# Altium PCB Altium_PCB_Rev3.PcbDoc
Units mil, origin at the board's own origin, x right, y up, seen from the top; angles counter-clockwise.
Board outline 1482.14 x 1194.03 mil, 4 copper layers (Top Layer, Layer 1 - GND, Layer 2 - PWR, Bottom Layer), stack 62.45 mil thick; 49 components, 31 nets, 195 pads, 78 vias.
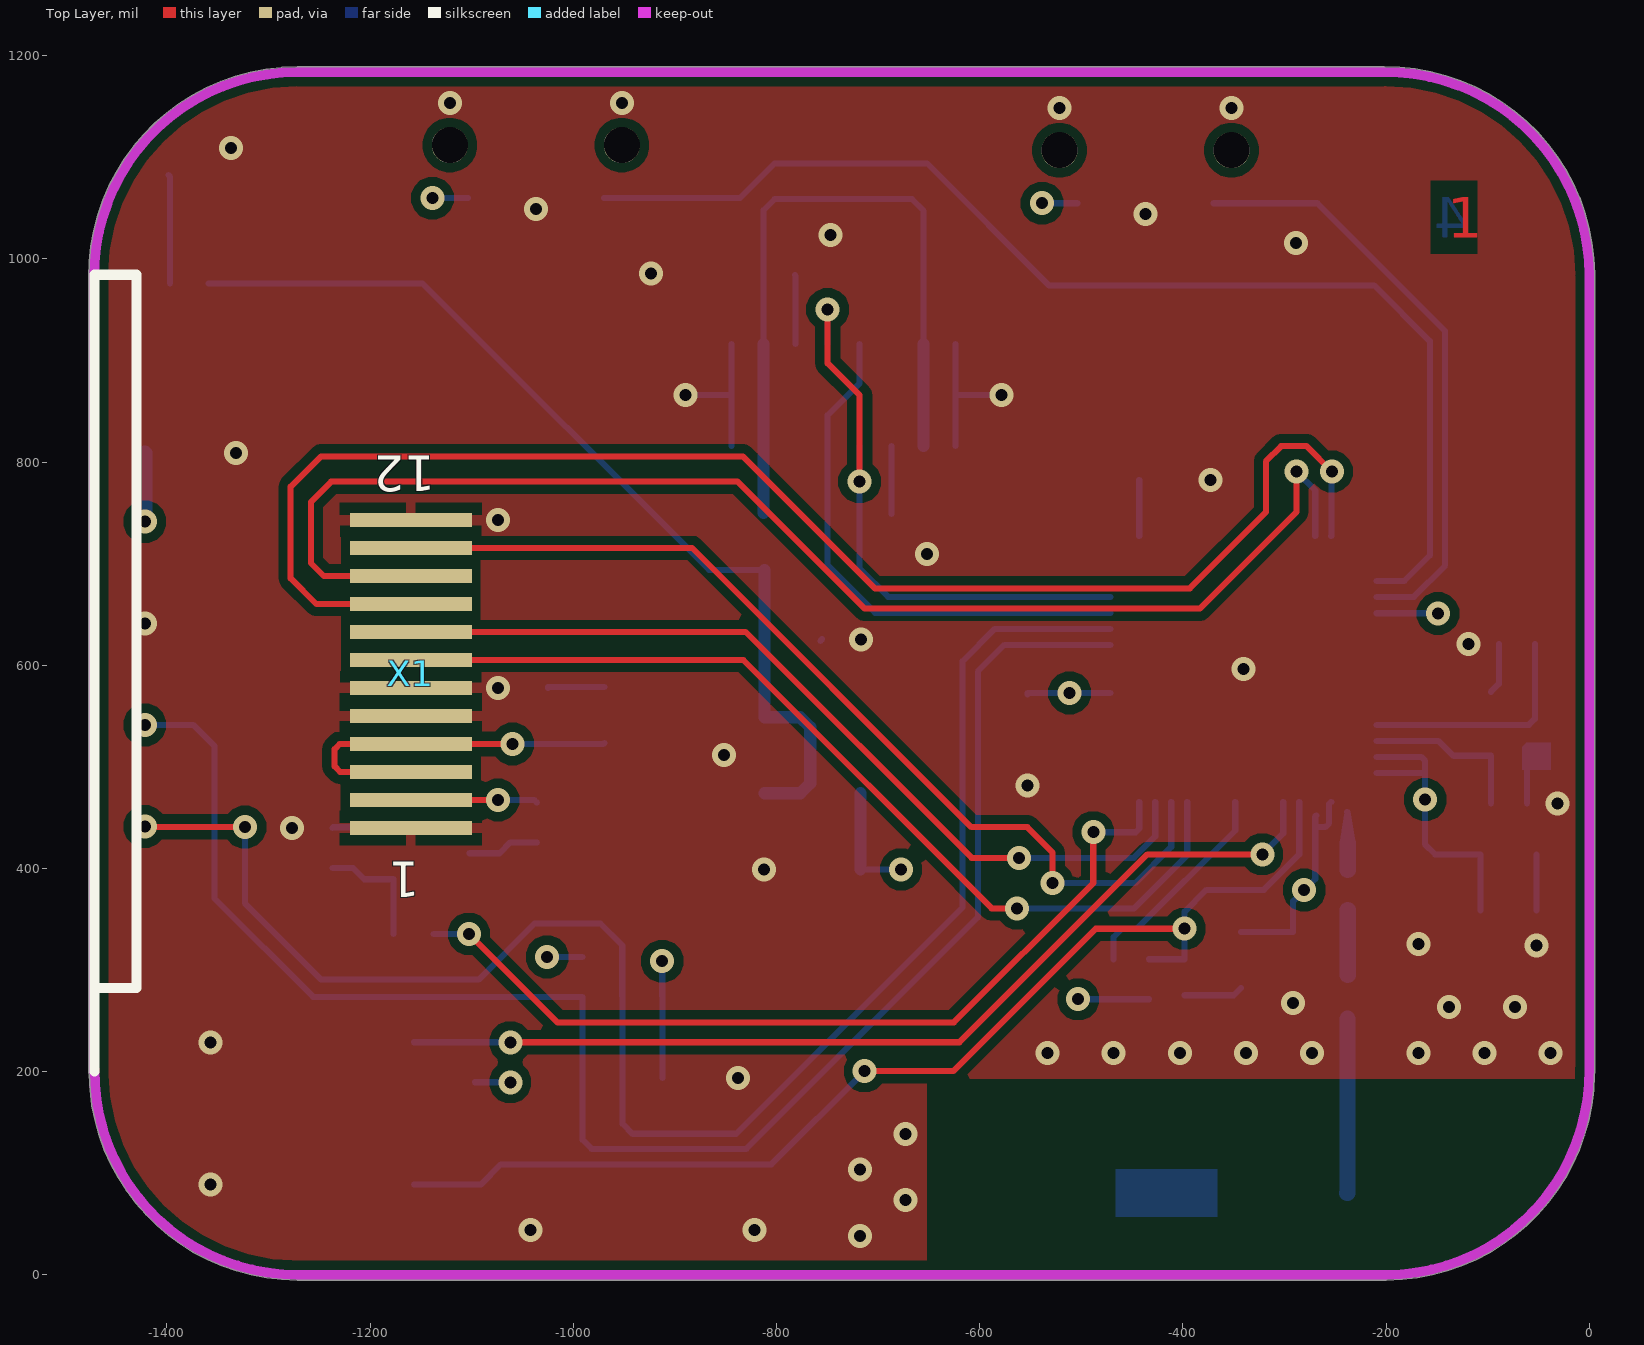
[diagram p0: Top Layer view]
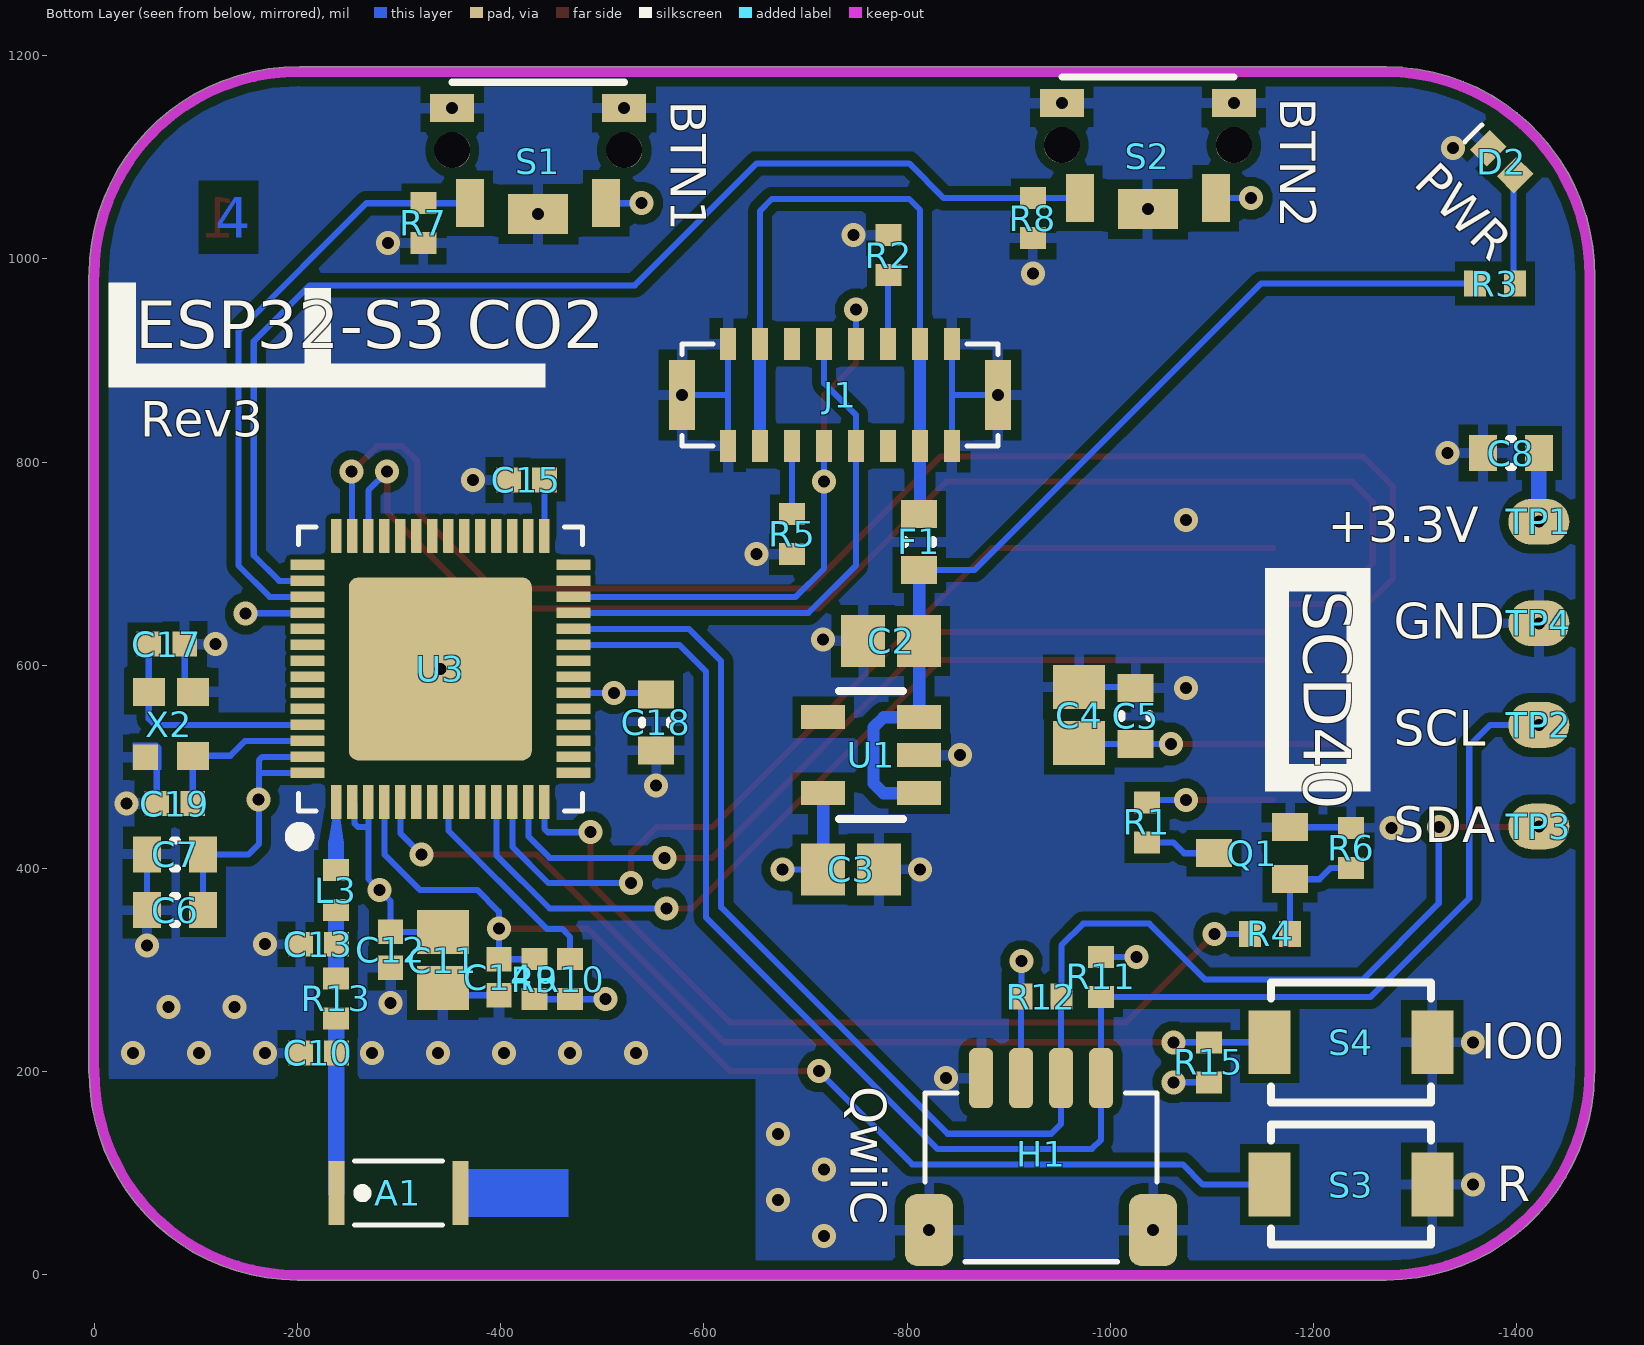
[diagram p1: Bottom Layer view, seen from below]
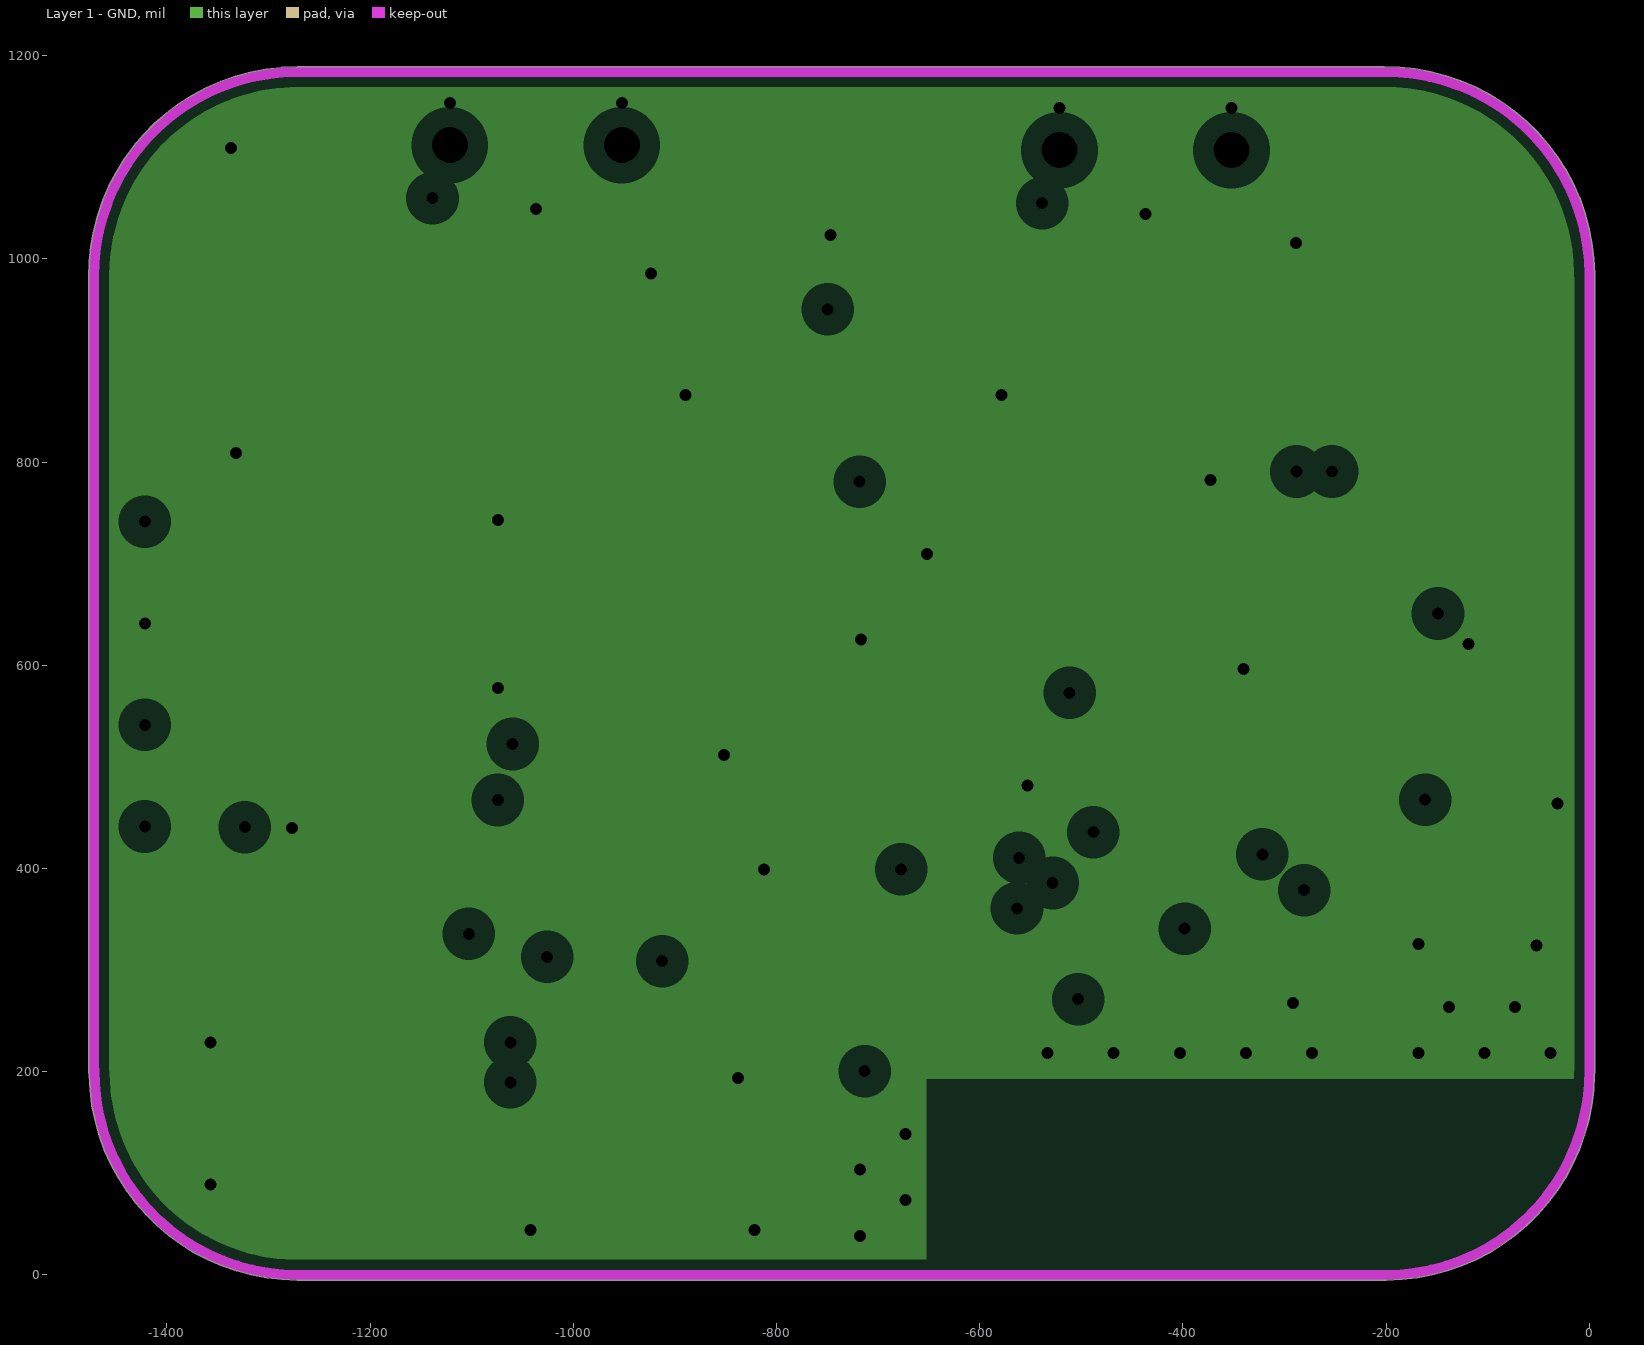
[diagram p2: Layer 1 - GND, clearances drawn from the general rule]
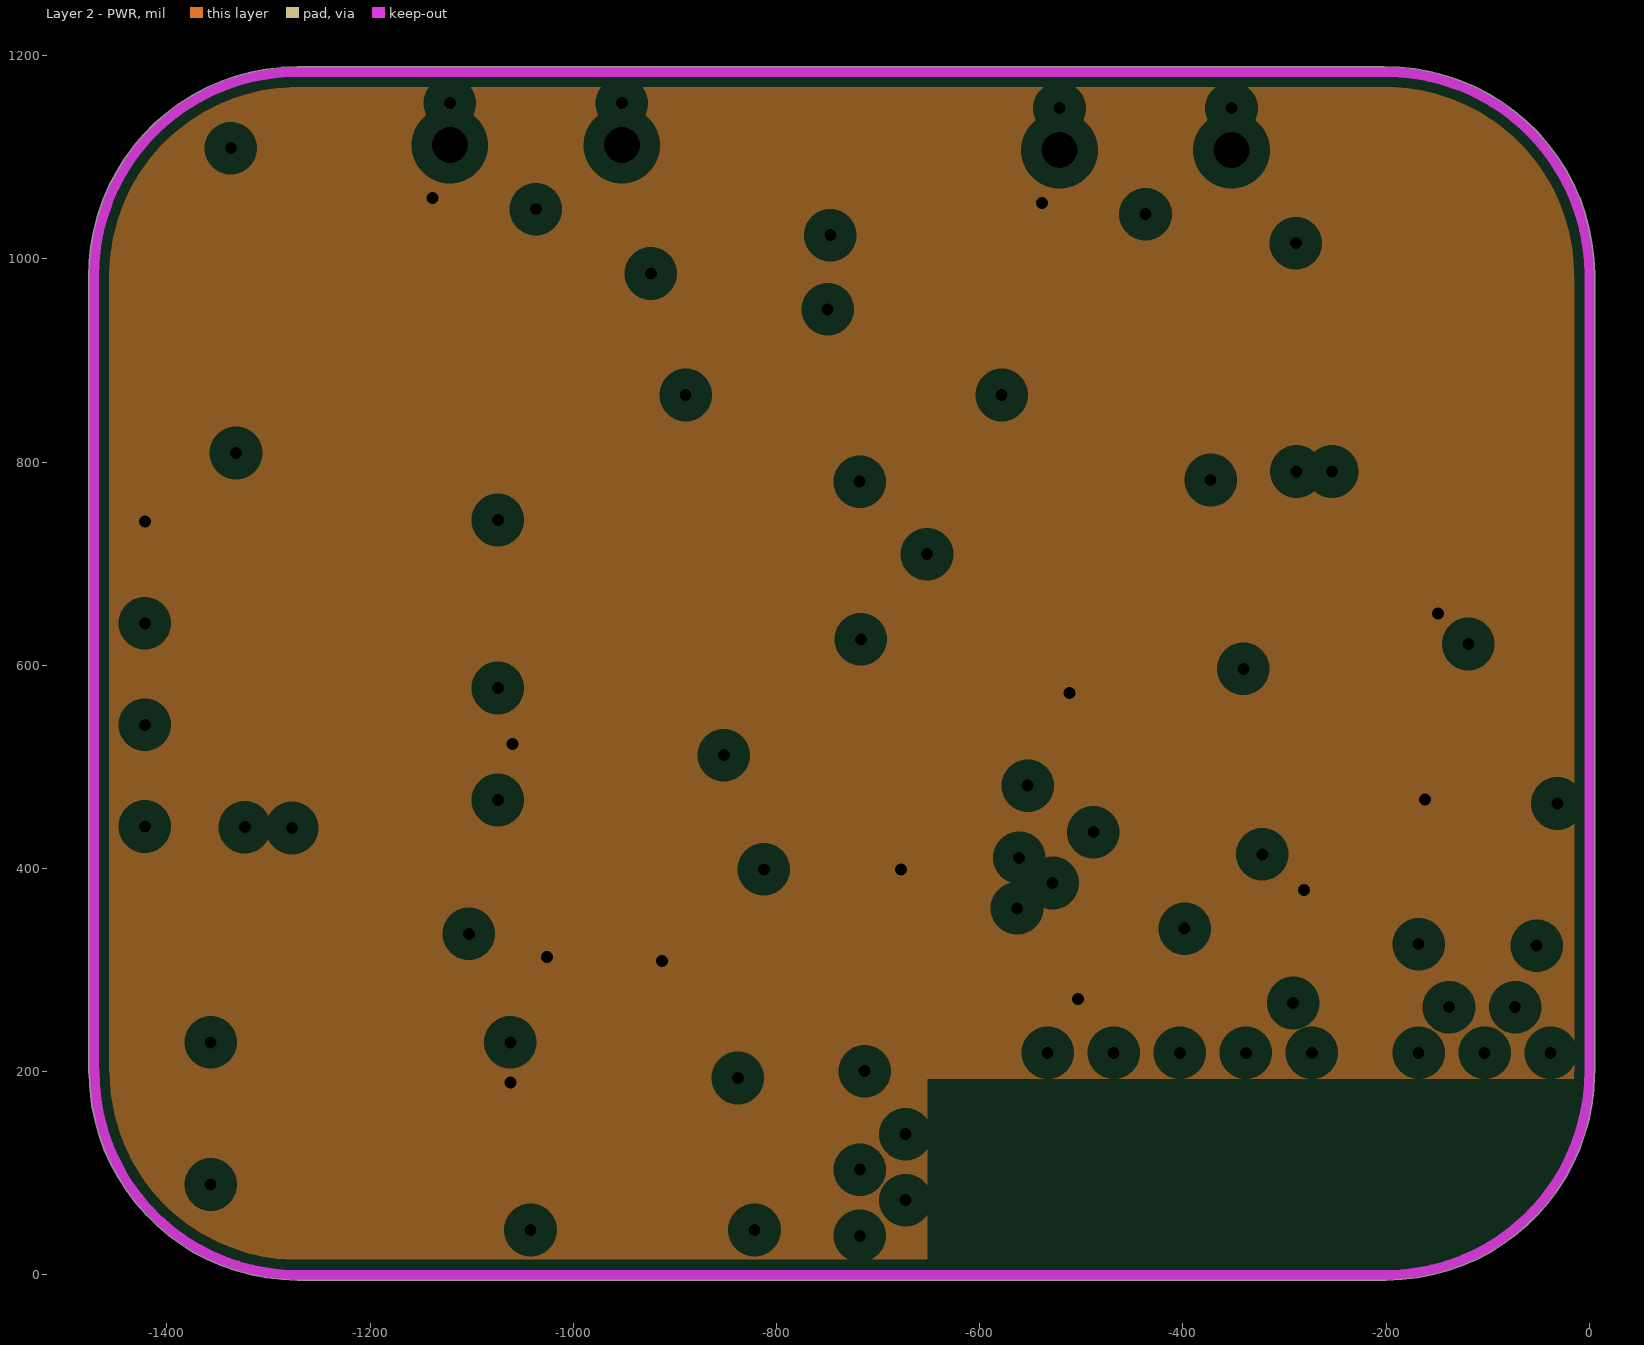
[diagram p3: Layer 2 - PWR, clearances drawn from the general rule]
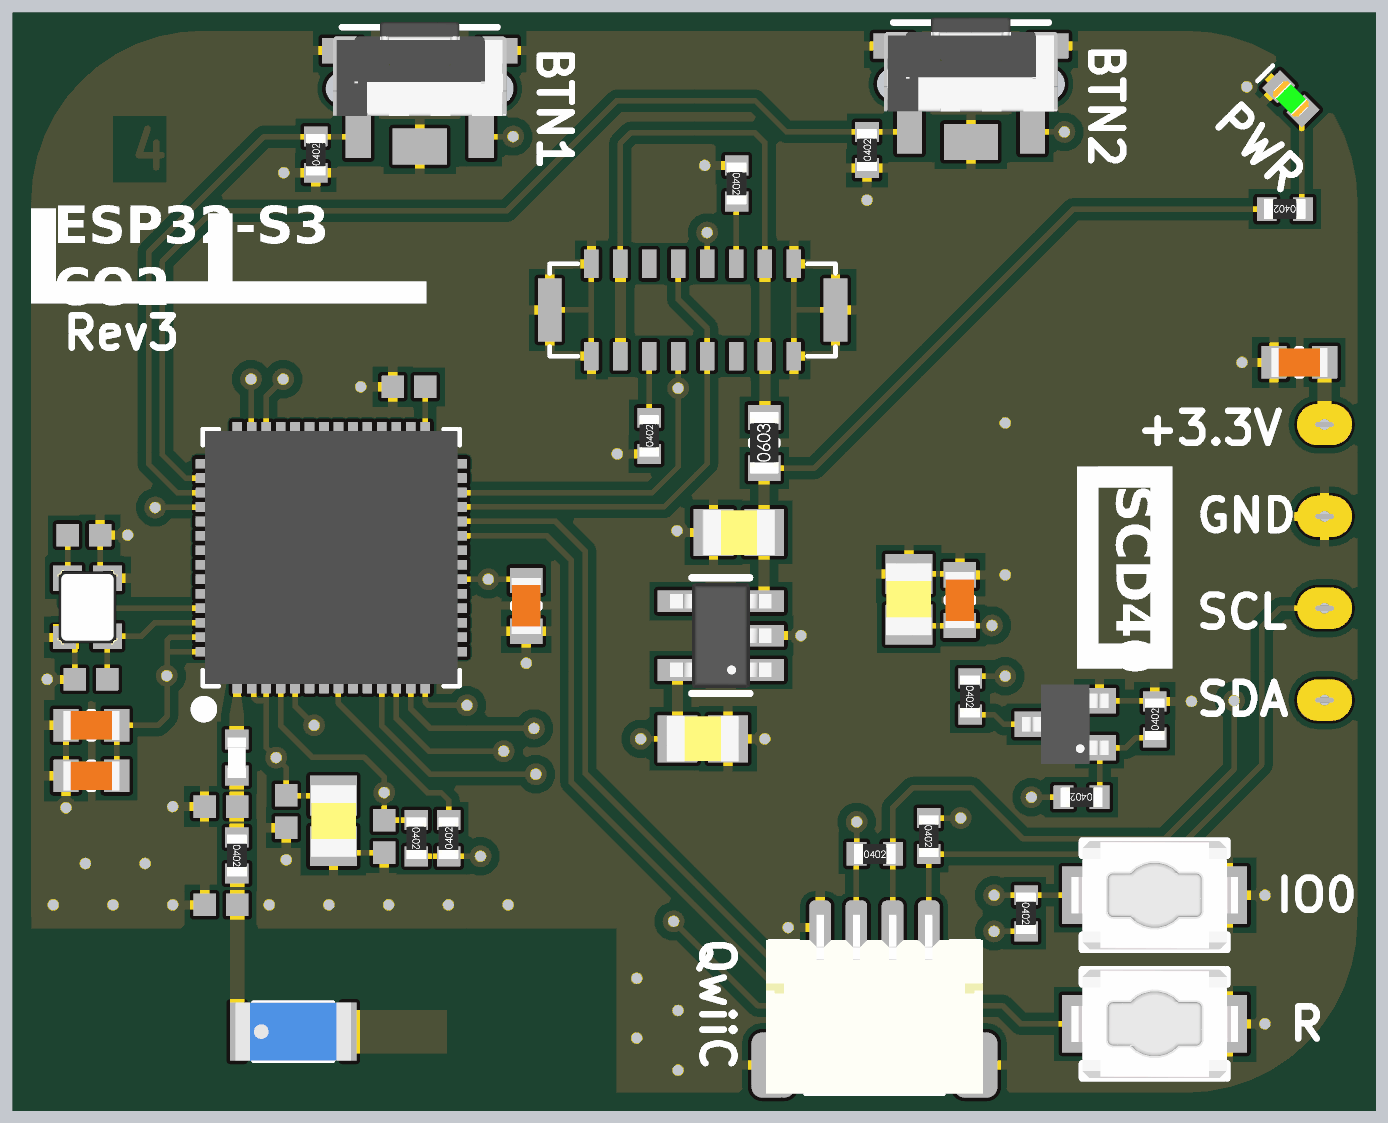
[diagram p4: 3D render of the assembled board from below, using the file's embedded part models]

## Layer stack, top to bottom
Top Solder: solder mask 0.0098, Solder Resist, Dk 3.5
Top Layer: signal copper 1.378
Dielectric 2: prepreg 8.2839, PP-006, Dk 4.1
Layer 1 - GND: plane copper 0.5984, net GND
Dielectric 1: dielectric 41.9291, FR-4, Dk 4.8
Layer 2 - PWR: plane copper 0.5984, net +3.3V
Dielectric 3: prepreg 8.2839, PP-006, Dk 4.1
Bottom Layer: signal copper 1.378
Bottom Solder: solder mask 0.0098, Solder Resist, Dk 3.5

## Board outline
-1476.8,198.87 -1476.8,981.86 cw(c-1271.8,984) -1271.8,1189.01 -202.03,1189.01 cw(c-199.89,984.01) 5.12,985.46 5.33,984.01 5.33,198.99 5.01,197.22 cw(c-199.99,200) -199.96,-5.01 -199.99,-5.02 -1271.48,-5.02 cw(c-1271.48,200)

## Design rules (kind name [scope] priority, off if disabled: settings)
Clearance Clearance_U4 [All vs InComponent('U4')] p1: gap=8 ignorepadtopadclearanceinfootprint=FALSE
Clearance Clearance_U3 [All vs InComponent('U3')] p2: gap=5 ignorepadtopadclearanceinfootprint=FALSE
Clearance Clearance_J1 [All vs InComponent('J1')] p3: gap=7 ignorepadtopadclearanceinfootprint=FALSE
Clearance [All] p4: gap=9 ignorepadtopadclearanceinfootprint=FALSE
MinimumSolderMaskSliver [All] p1: minsoldermaskwidth=1
PlaneClearance [All] p1: clearance=20
PlaneConnect PlaneConnect_Via [(IsVia)] p1: planeconnectstyle=Direct reliefexpansion=20 reliefentries=4 reliefconductorwidth=10 reliefairgap=10
PlaneConnect [All] p2: planeconnectstyle=Relief reliefexpansion=20 reliefentries=4 reliefconductorwidth=10 reliefairgap=10
PolygonConnect PolygonConnect_Via [All vs (IsVia)] p1: connectstyle=Direct reliefconductorwidth=10 reliefentries=4 polygonreliefangle="90 Angle" airgapwidth=10
PolygonConnect [All] p2: connectstyle=Relief reliefconductorwidth=10 reliefentries=4 polygonreliefangle="90 Angle" airgapwidth=10
RoutingVias [All] p1: holewidth=28 width=50 viastyle="Through Hole" minholewidth=28 minwidth=50 maxholewidth=28 maxwidth=50
SilkToSilkClearance [All] p1 off: silktosilkclearance=1
SilkToSolderMaskClearance [IsPad] p1: minsilkscreentomaskgap=1 clearancetoexposedcopper=TRUE
SolderMaskExpansion [All] p1: expansion=4 istentingtop=FALSE
Width Width_RF [InNetClass('RF')] p1: maxlimit=15.91 minlimit=15.91 preferedwidth=15.91 impedanceprofiledriven=TRUE impedanceprofileid={8F698573-BB34-4F24-805D-D6F2146511F8} impedanceprofilevalue=50.000000 minimp=50.000000 maximp=50.000000 favimp=50.000000
Width [All] p2: maxlimit=20 minlimit=6 preferedwidth=6
25 further rules are at their usual default settings.

## Classes and differential pairs
net class RF: NetA1_1 NetL3_2

## Components (designator, comment, footprint, x,y, rotation, side; value= is the part's Value field where it differs from the comment)
A1 "ANT3216LL00R2400A" ANT3216LL00R2400A -299.26,80.51 r180 bottom value="Chip Antenna"
C2 "10uF" CAPC2012X140N -784.34,624 r0 bottom
C3 "10uF" CAPC2012X140N -744.97,399.19 r180 bottom
C4 "10uF" CAPC2012X140N -969.4,551.13 r90 bottom
C5 "0.1uF" CAPC1608X09L -1024.97,550.16 r90 bottom
C6 "1uF" CAPC1608X09L -79.46,359 r0 bottom
C7 "0.1uF" CAPC1608X09L -79.46,414 r0 bottom
C8 "0.1uF" CAPC1608X09L -1394.34,809 r0 bottom
C10 "DNP" CAPC1005X56N -220.6,218.55 r0 bottom
C11 "10uF" CAPC2012X140N -342.96,309.89 r270 bottom
C12 "0.1uF" CAPC1005X56N -291.55,320.16 r270 bottom
C13 "2.5pF" CAPC1005X56N -220.52,325.55 r0 bottom
C14 "1uF" CAPC1005X56N -398.27,293.03 r270 bottom
C15 "1uF" CAPC1005X56N -425.24,782.45 r0 bottom
C17 "10pF" CAPC1005X56N -71.31,621 r180 bottom
C18 "1uF" CAPC1608X09L -552.91,543.96 r90 bottom
C19 "10pF" CAPC1005X56N -79.18,464 r0 bottom
D2 "Green Led" LED1005X40N-Green -1385.12,1095.77 r225 bottom
F1 "PTC" "RESC1608X06L (0603 FOOTPRINT)" -811.9,721.44 r90 bottom
H1 "QWiiC" SM04B-SRSS-TB -931.9,119 r180 bottom locked
J1 "USB-C VERT" TYPE-C-31-G-06 -733.97,866.04 r180 bottom
L3 "2.2nF" INDC1005X40L -237.8,378.86 r90 bottom
Q1 "MMST3904" SC-70 -1139.56,415.08 r0 bottom
R1 "10R" "RESC1005X40L (0402 FOOTPRINT)" -1036.05,445.36 r270 bottom
R2 "5.1K" "RESC1005X40L (0402 FOOTPRINT)" -781.9,1003.68 r270 bottom
R3 "22K" "RESC1005X40L (0402 FOOTPRINT)" -1378.59,975.75 r0 bottom
R4 "1K" "RESC1005X40L (0402 FOOTPRINT)" -1157.28,335.67 r0 bottom
R5 "5.1K" "RESC1005X40L (0402 FOOTPRINT)" -686.72,729.09 r90 bottom
R6 "10K" "RESC1005X40L (0402 FOOTPRINT)" -1236.97,420.36 r90 bottom
R7 "10K" "RESC1005X40L (0402 FOOTPRINT)" -323.77,1035.14 r90 bottom
R8 "10K" "RESC1005X40L (0402 FOOTPRINT)" -923.77,1040.14 r90 bottom
R9 "10K" "RESC1005X40L (0402 FOOTPRINT)" -433.27,291.07 r270 bottom
R10 "10K" "RESC1005X40L (0402 FOOTPRINT)" -468.27,291.07 r90 bottom
R11 "10K" "RESC1005X40L (0402 FOOTPRINT)" -990.95,293.37 r270 bottom
R12 "10K" "RESC1005X40L (0402 FOOTPRINT)" -932.21,274 r180 bottom
R13 "0R" "RESC1005X40L (0402 FOOTPRINT)" -238,272.31 r270 bottom
R15 "10K" "RESC1005X40L (0402 FOOTPRINT)" -1096.9,209.31 r270 bottom
S1 "Push" 1TS003A-1600-3500A -436.9,1106.99 r180 bottom value="Switch R/A Micro"
S2 "Push" 1TS003A-1600-3500A -1036.9,1111.99 r180 bottom value="Switch R/A Micro"
S3 "=Value" TL1015AF160QG -1236.9,89 r180 bottom
S4 "=Value" TL1015AF160QG -1236.9,229 r180 bottom
TP1 "Test Point, 1mm Top Layer" TP100TL#1 -1408.79,570.38 r270 bottom
TP2 "Test Point, 1mm Top Layer" TP100TL#2 -1415.74,707.72 r180 bottom
TP3 "Test Point, 1mm Top Layer" TP100TL#3 -1415.74,918.72 r180 bottom
TP4 "Test Point, 1mm Top Layer" TP100TL#4 -1415.79,1022.38 r180 bottom
U1 "HT7833" SOT95P280X144-5N -764.66,511.6 r0 bottom
U3 "ESP32-S3FN8" "QFN56_0.4mm pitch - Rev2" -340.6,596.5 r90 bottom locked
X1 "TFT_1.69\"" "TFT_GLASS 1.69 INCH SPI" -1160.99,591.5 r180 top locked
X2 "40 Mhz" OSC20X16 -73.62,541.82 r90 bottom

## Footprints (in the part's own frame and the unit in brackets; to place one, negate y for a bottom-side part, rotate by r counter-clockwise, add the part's x,y. Pads: shape width x height; smd on the part's side, far side on the other; paste and mask are expansions set on the pad)
1TS003A-1600-3500A [mm] "SWITCH TACTILE R/A MICRO"
  rect 0.7x1.2 smd: 1(-1.7,-1.325) 2(1.7,-1.325)
  rect 1.1x0.7 smd: 4(-2.15,1.05) 4(2.15,1.05)
  rect 1.5x1 smd: 4(0,-1.6)
  round 0.9 hole 0.9 unplated: ""(-2.15,0) ""(2.15,0)
  silkscreen extent -2.15,1.7 2.15,1.7, body extent -2.4,-0.76 2.4,1.84, height 2.97
ANT3216LL00R2400A [mm] "2.4G Chip Antenna"
  rect 0.4x1.6 smd: 1(-1.55,0) 2(1.55,0)
  Top Layer region: 1.7,0.6 4.25,0.6 4.25,-0.6 1.7,-0.6
  silkscreen extent -1.1,-0.8 1.1,0.8, body extent -1.6,-0.8 1.6,0.8, height 1.21
CAPC1005X56N [mm] "Chip Capacitor, 2-Leads, Body 1.0x0.5mm, IPC Medium Density (0402 ceramic)"
  rect 0.62x0.62 smd: 1(-0.45,0) 2(0.45,0)
  body extent -0.55,-0.3 0.55,0.3, height 0.6
CAPC1608X09L [mm] "Chip Capacitor, 2-Leads, Body 1.6x0.8mm, IPC High Density (0603 dense)"
  rect 0.7x0.9 smd: 1(-0.7,0) 2(0.7,0)
  silkscreen extent -0.05,-0.35 0.05,0.35, body extent -0.89,-0.48 0.88,0.48, height 1.03
CAPC2012X140N [mm] "Chip Capacitor, 2-Leads, Body 2.0x1.3mm, IPC Medium Density (0805 ceramic)"
  rect 1.1x1.3 smd: 1(-0.7,0) 2(0.7,0)
  body extent -1,-0.62 1,0.63, height 1.24
INDC1005X40L [mm] "Chip Inductor, 2-Leads, Body 1.0x0.5mm, IPC Medium Density (0402)"
  rect 0.55x0.65 smd: 1(-0.5,0) 2(0.5,0)
  body extent -0.56,-0.26 0.56,0.26, height 0.65
LED1005X40N-Green [mm] "Chip LED 2-Leads, Body 1.0x0.5mm, (0402)"
  rect 0.6x0.7 smd: 1(-0.475,0) 2(0.475,0)
  silkscreen extent -1,-0.3 -1,0.3, body extent -0.5,-0.3 0.5,0.3, height 0.2
OSC20X16 [mm] "Crystal 2.0mm x 1.60mm 0.5mm height"
  rect 0.7x0.8 smd: 1(-0.783,-0.591) 2(0.817,-0.591) 3(0.817,0.509)
  rect 0.635x0.635 smd: 4(-0.817,0.591)
  Top Layer region: -1.138,0.196 -0.554,0.196 -0.453,0.298 -0.453,0.907 -1.138,0.907
  body extent -1.01,-0.87 1.04,0.78, height 0.4
"QFN56_0.4mm pitch - Rev2" [mm] "QFN, 56-Leads, Body 7x7mm, Pitch 0.4mm, IPC Medium Density"
  rrect10% 0.85x0.267 smd: 1(-3.326,2.6) 2(-3.326,2.2) 3(-3.326,1.8) 4(-3.326,1.4) 5(-3.326,1) 6(-3.326,0.6) 7(-3.326,0.2) 8(-3.326,-0.2) 9(-3.326,-0.6) 10(-3.326,-1) 11(-3.326,-1.4) 12(-3.326,-1.8) 13(-3.326,-2.2) 14(-3.326,-2.6) 29(3.326,-2.6) 30(3.326,-2.2) 31(3.326,-1.8) 32(3.326,-1.4) 33(3.326,-1) 34(3.326,-0.6) 35(3.326,-0.2) 36(3.326,0.2) 37(3.326,0.6) 38(3.326,1) 39(3.326,1.4) 40(3.326,1.8) 41(3.326,2.2) 42(3.326,2.6)
  rrect10% 0.267x0.85 smd: 15(-2.6,-3.326) 16(-2.2,-3.326) 17(-1.8,-3.326) 18(-1.4,-3.326) 19(-1,-3.326) 20(-0.6,-3.326) 21(-0.2,-3.326) 22(0.2,-3.326) 23(0.6,-3.326) 24(1,-3.326) 25(1.4,-3.326) 26(1.8,-3.326) 27(2.2,-3.326) 28(2.6,-3.326) 43(2.6,3.326) 44(2.2,3.326) 45(1.8,3.326) 46(1.4,3.326) 47(1,3.326) 48(0.6,3.326) 49(0.2,3.326) 50(-0.2,3.326) 51(-0.6,3.326) 52(-1,3.326) 53(-1.4,3.326) 54(-1.8,3.326) 55(-2.2,3.326) 56(-2.6,3.326)
  rrect10% 4.572x4.572 smd paste-4: 57(0,0)
  silkscreen extent -4.37,-3.55 3.55,3.7, body extent -3.5,-3.5 3.5,3.5, height 0.8
"RESC1005X40L (0402 FOOTPRINT)" [mm] "Chip Resistor, 2-Leads, Body 1.0x0.5mm, IPC Medium Density (0402)"
  rect 0.55x0.65 smd: 1(-0.5,0) 2(0.5,0)
  body extent -0.57,-0.27 0.58,0.28, height 0.41
"RESC1608X06L (0603 FOOTPRINT)" [mm] "Chip Resistor, 2-Leads, Body 1.6x0.8mm, IPC High Density (0603 dense)"
  rect 0.7x0.9 smd: 1(-0.7,0) 2(0.7,0)
  silkscreen extent -0.05,-0.35 0.05,0.35, body extent -0.85,-0.4 0.85,0.4, height 0.56
SC-70 [mm] "SOT23, 3-Leads, Body 2x1.25mm, Pitch 0.65mm"
  rect 0.9x0.7 smd: 1(-0.95,0.65) 2(-0.95,-0.65) 3(0.95,0)
  body extent -1.2,-1.1 1.2,1.1, height 1
SM04B-SRSS-TB [mm] "CONN HEADER 4POS .100 R/A QWIIC"
  rrect50% 0.6x1.5 smd: 1(1.5,1.9) 2(0.5,1.9) 3(-0.5,1.9) 4(-1.5,1.9)
  rrect50% 1.2x1.8 smd: 5(-2.8,-1.9) 5(2.8,-1.9)
  silkscreen extent -2.9,-2.69 2.9,1.52, body extent -3,-2.69 3,2.26, height 3.25
SOT95P280X144-5N [mm] "SOT23, 5-Leads, Body 3.1x3.0mm (max), Pitch 0.95mm, IPC Medium Density (RFMD SOT23-5)"
  rect 1.1x0.6 smd: 1(-1.2,0.95) 2(-1.2,0) 3(-1.2,-0.95) 4(1.2,-0.95) 5(1.2,0.95)
  silkscreen extent -0.8,-1.6 0.8,1.6, body extent -1.4,-1.45 1.4,1.45, height 1.45
"TFT_GLASS 1.69 INCH SPI" [mm] "TFT_GLASS SPI 1.69 INCH ROUNDED"
  rect 3.048x0.35 smd: 1(-0.026,3.85) 2(-0.026,3.15) 3(-0.026,2.45) 4(-0.026,1.75) 5(-0.026,1.05) 6(-0.026,0.35) 7(-0.026,-0.35) 8(-0.026,-1.05) 9(-0.026,-1.75) 10(-0.026,-2.45) 11(-0.026,-3.15) 12(-0.026,-3.85)
  silkscreen extent 6.83,-9.98 7.88,9.93, body extent -29.6,-15.07 7.87,15.12, height 2.54
TL1015AF160QG [mm] "SWITCH TACTILE SPST-NO 0.05A 12V"
  rect 1.05x1.59 smd: 1(-2.032,0) 2(2.032,0)
  silkscreen extent -2,-1.5 2,1.5, body extent -2.3,-1.5 2.3,1.5, height 2
TP100TL#1 [mil] "Test Point"
  oval 45x60 smd paste-19.68 mask+3: 1(-171,13)
TP100TL#2 [mil] "Test Point"
  oval 60x45 smd paste-19.68 mask+3: 1(6.04,-166.34)
TP100TL#3 [mil] "Test Point"
  oval 60x45 smd paste-19.68 mask+3: 1(6.04,-477.34)
TP100TL#4 [mil] "Test Point"
  oval 60x45 smd paste-19.68 mask+3: 1(6,-381)
TYPE-C-31-G-06 [mm] "USB-C Connector Vert"
  rect 0.4x0.79 smd: A1(2.8,1.275) A4(2,1.275) A5(1.2,1.275) A6(0.4,1.275) A7(-0.4,1.275) A8(-1.2,1.275) A9(-2,1.275) A12(-2.8,1.275) B1(-2.8,-1.275) B4(-2,-1.275) B5(-1.2,-1.275) B6(-0.4,-1.275) B7(0.4,-1.275) B8(1.2,-1.275) B9(2,-1.275) B12(2.8,-1.275)
  rect 0.65x1.75 smd: TAB1(-3.95,0) TAB2(3.95,0)
  silkscreen extent -3.95,-1.28 3.95,1.27, body extent -4.25,-1.28 4.27,1.27, height 7.21

## Part data
A1: "Antenna Chip 2.4Gig", Manufacturer=YAGEO, Part_Number=ANT3216LL00R2400A, Vendor=LCSC
C2 C3 C11: library part CAP_0805, "CAP 10uF 50V 0805", Part_Footprint=0805
C4: library part CAP_0805, "CAP 10uF 0805", Part_Footprint=0805
C5 C7 C8: library part CAP_0603, "CAP 0.1uF 0603", Part_Footprint=0603
C6 C18: library part CAP_0603, "CAP 1uF 0603", Part_Footprint=0603
C10: library part CAP_0402, "CAP DNP 0402", Part_Footprint=0402
C12: library part CAP_0402, "CAP 0.1uF 0402", Part_Footprint=0402
C13: library part CAP_0402, "CAP 2.5pF 0402", Part_Footprint=0402
C14 C15: library part CAP_0402, "CAP 1uF 0402", Part_Footprint=0402
C17 C19: library part CAP_0402, "CAP 10pF 0402", Part_Footprint=0402
D2: library part LED_0402_SMALL_GREEN, "LED Green 0402", Part_Footprint=0402, Part_Number=C74338, Vendor=LCSC
F1: library part PTC_FUSE_0603, "PTC FUSE 0.5mA hold, 1A trip 0603", Manufacturer="JDT Fuse", Part_Number=C2982257, Vendor=LCSC
H1: library part SM04B-SRSS-TB, "CONN HEADER 4POS .100 R/A QWIIC", Manufacturer=JST, Part_Number=PRT-14417, Vendor=Digi-Key
J1: library part USB-C_VERT, "CONN RECPT USB-C Vertical", Manufacturer="Korean Elec", Part_Footprint=SMT, Part_Number=C283539, Vendor=LCSC
L3: library part Inductor, "Inductor 2.2nF"
Q1: "TRANSISTOR NPN GP 40V SC-70", Manufacturer=Changjiang, Part_Footprint=SC-70, Part_Number=C54879, Vendor=LCSC
R1: library part RES_0402, "RES 10R 0402", Part_Footprint=0402
R2 R5: library part RES_0402, "RES 5.1K 0402", Part_Footprint=0402
R3: library part RES_0402, "RES 22K 0402", Part_Footprint=0402
R4: library part RES_0402, "RES 1K 0402", Part_Footprint=0402
R6 R7 R8 R9 R10 R11 R12 R15: library part RES_0402, "RES 10K 0402", Part_Footprint=0402
R13: library part RES_0402, "RES 0R 0402", Part_Footprint=0402
S1 S2: library part "SWITCH TACTILE R/A_MICRO", "SWITCH TACTILE R/A MICRO", Manufacturer=HYP, Part_Number=C255805, Vendor=LCSC
S3 S4: library part TL1015AF160QG, "SWITCH MOMENTARY", Part_Footprint=SMD, Part_Number=TL1015AF160QG, Vendor=Digi-Key
TP1 TP2 TP3 TP4: Manufacturer=N/A, Part_Number=N/A
U1: "IC LDO 3.3V 0.5A SOT23-5", Manufacturer=Holtek, Part_Footprint=SOT23-5, Part_Number=C164106, Vendor=LCSC
U3: library part ESP32-S3, "WIFI/Bluetooth, 8M PSRAM, QFN-56 7x7", Manufacturer=Espressif, Part_Footprint=QFN56, Part_Number=ESP32-S3FN8
X1: library part "TFT_GLASS 1.69 INCH COLOR SPI", "1.69 INCH TFT SPI GLASS COLOR ROUNDED CORNERS", Part_Number=LH169TIG01, Vendor=Aliexpress/Alibaba
X2: library part 40Mhz, "CRYSTAL 40MHZ 10PF SMD", Manufacturer=ECS, Part_Number=ECS-400-10-37B2-CKM, Vendor=Digi-Key

## Via types
v1: diameter 23.62, hole 11.81, Top Layer to Bottom Layer, tented both sides, 78 vias

## Nets (pads, with @x,y where several pads share a name; then routed paths per layer and width w, separated by ;. In a path a pad name is that pad's centre, name@x,y a point inside that pad or via, vN(x,y) a via of type N, cw(c..) or ccw(c..) an arc to the next point about the centre after c; other vN are vias at no path point)
+3.3V: C3.1 C4.1 C5.1 C6.1 C7.1 C8.1 C11.1 C12.1 C18.2 H1.3 R9.2 R10.1 R11.1 R12.1 R15.2 S1.2 S2.2 TP1.1 U1.5 U3.2 U3.3 U3.20 U3.46 U3.55 U3.56 X1.3 X1.4 | length 1519.3
  Top Layer w6: X1.3 -1229.41,495.04 -1234.97,500.6 -1234.97,517.6 -1229.97,522.6 X1.4 v1(-1059.78,522.6)
  Bottom Layer w6: C8.1 C8.1@-1421.79,808.89 ; v1(-1138.65,1059.82) S2.2 ; R15.2 v1(-1062.08,189.63) ; v1(-1059.78,522.6) C5.1 -970.37,522.6 C4.1 ; v1(-1025.77,313.05) R11.1 ; v1(-912.53,308.81) R12.1 -912.21,273.68 H1.3 ; C3.1 v1(-677.41,399.19) ; C18.2 C18.2@-551.55,572.88 ; C18.2@-552.91,572.88 U3.20 ; v1(-538.65,1054.82) S1.2 ; v1(-503.09,271.38) R10.1 R9.2 ; C11.1 C12.1@-291.55,337.45 ; C12.1 -291.55,367.88 -269.73,389.69 -269.73,440.75 ; U3.3@-268.58,452.34 -269.73,451.19 -269.73,440.75 ; U3.2 -256.23,463.3 -256.23,444.27 -259.75,440.75 -269.73,440.75 ; U3.56 -161.9,494.14 ; U3.55 -165.41,509.88 -161.9,506.37 -161.9,494.14 ; U3.46 -209.33,651.31 -149.34,651.31 v1(-149.03,651) ; C6.1 C7.1 -151.9,414 -161.9,424 -161.9,494.14
  Bottom Layer w12: C3.1 U1.5
  Bottom Layer w15: v1(-1421.79,741.38) C8.1@-1421.79,808.89
  other v1: -280.64,378.79 -161.55,467.88 -511.55,572.88
BUTTON_1: R7.2 S1.1 U3.45 | length 591.5
  Bottom Layer w6: S1.1 R7.2 -267.73,1054.82 -141.9,929 -141.9,698.12 -172.66,667.36 U3.45
BUTTON_2: R8.2 S2.1 U3.44 | length 1173.7
  Bottom Layer w6: S2.1 R8.2 -836.07,1059.82 -801.9,1094 -651.9,1094 -531.9,974 -211.9,974 -156.9,919 -156.9,708.12 -181.91,683.11 U3.44
D+: J1.A6 J1.B6 U3.26 | length 595.4
  Top Layer w6: v1(-749.71,950.31) -749.71,897.34 -718.22,865.84 v1(-718.22,780.84)
  Bottom Layer w6: J1.A6 v1(-749.71,950.31) ; J1.B6 v1(-718.22,780.84) -718.22,695.31 -690.27,667.36 U3.26
D-: J1.A7 J1.B7 U3.25 | length 528.4
  Bottom Layer w6: J1.A7 -718.22,877.68 -749.71,846.18 J1.B7 -749.71,698.42 -702.91,651.62 U3.25
EN: C14.1 R9.1 S3.1 U3.4 | length 1132.5
  Top Layer w6: v1(-713.23,200.55) -626.06,200.55 -485.86,340.75 v1(-398.27,340.75)
  Bottom Layer w6: S3.1 -1091.03,89 -1071.27,108.75 -805.03,108.75 v1(-713.23,200.55) ; R9.1 C14.1 v1(-398.27,340.75) -398.27,357.62 -376.9,379 -320.43,379 -285.48,413.95 U3.4
GND: C2.2 C3.2 C4.2 C5.2 C6.2 C7.2 C8.2 C10.2 C11.2 C12.2 C13.2 C14.2 C15.2 C17.2 C18.1 C19.2 D2.1 H1.4 H1.5 J1.A1 J1.A12 J1.B1 J1.B12 J1.TAB1 J1.TAB2 Q1.2 R2.1 R5.1 R6.2 R7.1 R8.1 S1.4 S2.4 S3.2 S4.2 TP4.1 U1.2 U3.57 X1.1 X1.5 X1.6 X1.12 X2.2 X2.4 | length 623.4
  Bottom Layer w6: R6.2@-1237.08,439.92 R6.2 -1236.34,440.67 Q1.2 ; C5.2@-1024.97,578.68 C4.2 ; v1(-889.48,866.04) -844.2,866.04 ; J1.B12 -844.2,866.04 ; J1.A1 -844.2,866.04 ; C2.2 C2.2@-755.11,625.67 ; J1.B1 -623.73,866.04 ; J1.A12 -623.73,866.04 ; v1(-578.45,866.04) -623.73,866.04 ; C14.2 -349.97,275.32 C11.2 ; X2.2 -89.03,581.87 C17.2 ; C19.2 -61.47,498.52 X2.4 ; C6.2 C7.2
  other v1: -718.06,38.55 -1042.14,44.19 -821.66,44.19 -673.13,73.55 -1356.9,89 -718.06,103.55 -673.13,138.55 -838.03,193.8 -533.13,218.55 -468.13,218.55 -403.13,218.55 -338.13,218.55 -273.13,218.55 -168.06,218.55 -103.06,218.55 -38.06,218.55 -1356.9,229 -138.06,263.55 -73.06,263.55 -291.55,267.63 -51.9,324.18 -167.98,325.55 -812.53,399.19 -1276.97,439.92 -31.47,464 -552.91,481.58 -851.9,511.6 -1074.24,577.72 -340.6,596.5 -119.03,621 -716.97,625.67 -1421.79,641.38 -651.9,709.41 -1074.24,743.07 -372.71,782.45 -1331.97,809 -923.76,985.64 -288.95,1015.45 -747.08,1023.37 -436.9,1044 -1036.9,1049 -1337.08,1109 -521.55,1148.33 -352.25,1148.33 -1121.55,1153.33 -952.25,1153.33
IO0: R15.1 S4.1 U3.5 | length 971.7
  Top Layer w6: v1(-1062.08,229) -620.03,229 -435.03,414 v1(-321.9,414)
  Bottom Layer w6: S4.1 R15.1 v1(-1062.08,229) ; v1(-321.9,414) -301.23,434.67 U3.5
LCD_BL: R4.2 U3.14 | length 865.3
  Top Layer w6: v1(-1102.78,335.67) -1015.65,248.55 -625.48,248.55 -488.27,385.75 v1(-488.27,435.75)
  Bottom Layer w6: R4.2 v1(-1102.78,335.67) ; v1(-488.27,435.75) -446.47,435.75 -442.96,439.27 U3.14
NetA1_1: A1.1 C10.1 R13.2 | length 171.7
  Bottom Layer w15.91: A1.1 -238.15,80.6 R13.2@-238.15,252.18
NetC2_1: C2.1 F1.1 R3.2 U1.1 U1.3 | length 961.8
  Bottom Layer w6: R3.2 -1148.27,975.75 -866.4,693.88 F1.1
  Bottom Layer w12: U1.1 -776.7,474.19 -766.9,484 -766.9,539 -776.9,549 U1.3 C2.1 F1.1
NetC13_1: C13.1 L3.1 R13.1 | length 63.9
  Bottom Layer w15.91: R13.1@-237.8,295.23 -237.8,326.55 L3.1
NetC15_1: C15.1 U3.29 | length 55
  Bottom Layer w6: U3.29 C15.1
NetD2_2: D2.2 R3.1 | length 107.4
  Bottom Layer w6: D2.2 -1396.95,1081.16 R3.1@-1396.95,975.75
NetF1_2: F1.2 J1.A4 J1.A9 J1.B4 J1.B9 | length 697.8
  Bottom Layer w6: F1.2@-812.71,749.8 F1.2 ; J1.A4 -812.71,1048.19 -801.9,1059 -666.9,1059 -655.23,1047.32 J1.A9
  Bottom Layer w12: F1.2@-812.71,749.8 J1.B9 J1.A4 ; J1.B4 J1.A9
NetJ1_A5: J1.A5 R2.2 | length 68
  Bottom Layer w6: R2.2 -781.21,983.31 J1.A5
NetJ1_B5: J1.B5 R5.2 | length 67.1
  Bottom Layer w6: R5.2 J1.B5
NetL3_2: L3.2 U3.1 | length 92.5
  Bottom Layer w6: -242.23,427.55 -238.23,455.55 -233.23,426.55 ; -238.23,428.55 -238.23,436.55
  Bottom Layer w15.91: L3.2 -237.8,425.35
NetQ1_1: Q1.1 R4.1 R6.1 | length 118.5
  Bottom Layer w6: R6.1 -1216.97,400.67 -1205.78,389.49 Q1.1 R4.1
NetQ1_3: Q1.3 R1.2 | length 70.5
  Bottom Layer w6: Q1.3 -1072.56,415.08 -1061.97,425.67 R1.2
NetR1_1: R1.1 X1.2 | length 124.9
  Top Layer w6: X1.2 v1(-1074.24,467.48)
  Bottom Layer w6: v1(-1074.24,467.48) -1038.49,467.48 R1.1
NetR10_2: R10.2 U3.8 | length 213.2
  Bottom Layer w6: R10.2 -468.27,332.62 -460.35,340.55 -445.35,340.55 -348.47,437.43 U3.8
SCL: H1.1 R11.2 TP2.1 U3.23 | length 1640.7
  Bottom Layer w6: v1(-1421.79,541.38) -1373.9,541.38 -1353.27,520.75 -1353.27,370.75 -1256.2,273.68 R11.2 H1.1 -990.96,133.05 -981.9,124 -829.78,124 -601.9,351.88 -601.9,594 -575.78,620.12 U3.23
SDA: H1.2 R12.2 TP3.1 U3.24 | length 1615.4
  Top Layer w6: v1(-1421.79,441.38) -1421.47,441.07 -1323.59,441.07 v1(-1323.27,440.75)
  Bottom Layer w6: v1(-1323.27,440.75) -1323.27,365.75 -1248.27,290.75 -1093.27,290.75 -1038.27,345.75 -973.27,345.75 -951.9,324.38 R12.2 -951.59,273.68 H1.2 -951.59,148.68 -941.9,139 -839.78,139 -616.9,361.88 -616.9,604 -585.03,635.87 U3.24
SPI_CLK: U3.41 X1.9 | length 1471.3
  Top Layer w6: X1.9 -1252.92,660.4 -1278.27,685.75 -1278.27,775.75 -1248.27,805.75 -833.27,805.75 -703.27,675.75 -393.27,675.75 -318.27,750.75 -318.27,800.75 -303.27,815.75 -278.27,815.75 v1(-253.27,790.75)
  Bottom Layer w6: U3.41 -253.63,727.81 -253.63,790.4 v1(-253.27,790.75)
SPI_MOSI: U3.40 X1.10 | length 1344
  Top Layer w6: X1.10 -1245.48,687.96 -1258.27,700.75 -1258.27,760.75 -1238.27,780.75 -838.27,780.75 -713.27,655.75 -383.27,655.75 -288.27,750.75 v1(-288.27,790.75)
  Bottom Layer w6: v1(-288.27,790.75) -269.73,772.21 U3.40
TFT_CS: U3.13 X1.8 | length 867.5
  Top Layer w6: X1.8 -830.36,632.84 -608.07,410.55 v1(-561.23,410.55)
  Bottom Layer w6: v1(-561.23,410.55) -448.23,410.55 -427.21,431.57 U3.13
TFT_DC: U3.11 X1.7 | length 939.7
  Top Layer w6: X1.7 -832.8,605.28 -588.27,360.75 v1(-563.27,360.75)
  Bottom Layer w6: v1(-563.27,360.75) -448.03,360.75 -395.71,413.06 U3.11
TFT_RST: U3.12 X1.11 | length 961.6
  Top Layer w6: X1.11 -883.04,715.51 -608.27,440.75 -553.27,440.75 -528.27,415.75 v1(-528.27,385.75)
  Bottom Layer w6: v1(-528.27,385.75) -447.03,385.75 -411.46,421.32 U3.12
XTAL_N: C17.1 U3.53 X2.3 | length 232.2
  Bottom Layer w6: U3.53 -59.52,541.38 -53.59,547.3 X2.3 C17.1
XTAL_P: C19.1 U3.54 X2.1 | length 165.8
  Bottom Layer w6: U3.54 -148.53,525.63 -133.9,511 X2.1 C19.1
pads on no net: A1.2 J1.A8 J1.B8 S1. S2. U1.4 U3.6 U3.7 U3.9 U3.10 U3.15 U3.16 U3.17 U3.18 U3.19 U3.21 U3.22 U3.27 U3.28 U3.30 U3.31 U3.32 U3.33 U3.34 U3.35 U3.36 U3.37 U3.38 U3.39 U3.42 U3.43 U3.47 U3.48 U3.49 U3.50 U3.51 U3.52

## Polygon pours and split planes (outlines as drawn)
GND on Bottom Layer "GND_L04_P000" (solid, pour order 0): -101.47,1190 -101.47,1185 8.53,1075 8.53,125 -121.47,-5 -1346.47,-5 -1476.47,125 -1476.47,1060 -1346.47,1190
GND on Top Layer "GND_L01_P001" (solid, pour order 1): -98.97,1190 -98.97,1185 11.03,1075 11.03,125 -118.97,-5 -1343.97,-5 -1473.97,125 -1473.97,1060 -1343.97,1190
+3.3V on Layer 2 - PWR (split plane): -187.79,1168.63 -175.75,1167.44 -163.8,1165.47 -152.01,1162.72 -140.42,1159.2 -129.09,1154.94 -118.06,1149.94 -107.39,1144.23 -97.11,1137.84 -87.27,1130.79 -77.91,1123.11 -69.07,1114.83 -60.79,1106 -53.11,1096.64 -46.06,1086.8 -39.67,1076.52 -33.96,1065.84 -28.96,1054.81 -24.7,1043.48 -21.18,1031.89 -18.44,1020.1 -16.46,1008.16 -15.28,996.11 -14.92,985.32 -14.97,985.32 -14.84,983.99 -14.77,982.55 -14.77,200.79 -14.91,199.02 -15.06,197.49 -15.07,197.12 -15.09,196.9 -15.08,196.83 -15.21,192.75 -651.27,192.75 -651.27,15.08 -1271.48,15.08 -1272.21,15.01 -1283.58,15.38 -1295.63,16.57 -1307.58,18.54 -1319.37,21.29 -1330.95,24.8 -1342.29,29.07 -1353.31,34.07 -1363.99,39.77 -1374.27,46.17 -1384.11,53.22 -1393.47,60.9 -1402.31,69.18 -1410.59,78.01 -1418.27,87.37 -1425.32,97.21 -1431.71,107.49 -1437.42,118.17 -1442.41,129.2 -1446.68,140.53 -1450.19,152.11 -1452.94,163.91 -1454.92,175.85 -1456.1,187.9 -1456.41,197.38 -1456.71,200.4 -1456.71,981.86 -1456.76,982.43 -1456.81,984 -1456.42,996.1 -1455.23,1008.15 -1453.26,1020.09 -1450.51,1031.88 -1447,1043.47 -1442.73,1054.8 -1437.73,1065.83 -1432.03,1076.5 -1425.63,1086.79 -1418.58,1096.63 -1410.9,1105.99 -1402.62,1114.82 -1393.79,1123.1 -1384.43,1130.78 -1374.59,1137.83 -1364.31,1144.22 -1353.63,1149.93 -1342.6,1154.93 -1331.27,1159.19 -1319.69,1162.71 -1307.89,1165.46 -1295.95,1167.43 -1283.9,1168.62 -1272.53,1168.99 -1271.8,1168.92 -202.03,1168.92 -201.46,1168.97 -199.89,1169.02
GND on Layer 1 - GND (split plane): -187.79,1168.63 -175.75,1167.44 -163.8,1165.47 -152.01,1162.72 -140.42,1159.2 -129.09,1154.94 -118.06,1149.94 -107.39,1144.23 -97.11,1137.84 -87.27,1130.79 -77.91,1123.11 -69.07,1114.83 -60.79,1106 -53.11,1096.64 -46.06,1086.8 -39.67,1076.52 -33.96,1065.84 -28.96,1054.81 -24.7,1043.48 -21.18,1031.89 -18.44,1020.1 -16.46,1008.16 -15.28,996.11 -14.92,985.32 -14.97,985.32 -14.84,983.99 -14.77,982.55 -14.77,200.79 -14.91,199.02 -15.06,197.49 -15.07,197.12 -15.09,196.9 -15.08,196.83 -15.21,192.75 -652.27,192.75 -652.27,15.08 -1271.48,15.08 -1272.21,15.01 -1283.58,15.38 -1295.63,16.57 -1307.58,18.54 -1319.37,21.29 -1330.95,24.8 -1342.29,29.07 -1353.31,34.07 -1363.99,39.77 -1374.27,46.17 -1384.11,53.22 -1393.47,60.9 -1402.31,69.18 -1410.59,78.01 -1418.27,87.37 -1425.32,97.21 -1431.71,107.49 -1437.42,118.17 -1442.41,129.2 -1446.68,140.53 -1450.19,152.11 -1452.94,163.91 -1454.92,175.85 -1456.1,187.9 -1456.41,197.38 -1456.71,200.4 -1456.71,981.86 -1456.76,982.43 -1456.81,984 -1456.42,996.1 -1455.23,1008.15 -1453.26,1020.09 -1450.51,1031.88 -1447,1043.47 -1442.73,1054.8 -1437.73,1065.83 -1432.03,1076.5 -1425.63,1086.79 -1418.58,1096.63 -1410.9,1105.99 -1402.62,1114.82 -1393.79,1123.1 -1384.43,1130.78 -1374.59,1137.83 -1364.31,1144.22 -1353.63,1149.93 -1342.6,1154.93 -1331.27,1159.19 -1319.69,1162.71 -1307.89,1165.46 -1295.95,1167.43 -1283.9,1168.62 -1272.53,1168.99 -1271.8,1168.92 -202.03,1168.92 -201.46,1168.97 -199.89,1169.02

## Keep-outs
Keep-Out Layer:
  lines w10: -1471.79,198.99 -1471.79,984.01 ; -1471.79,981.89 cw(c-1271.8,984) -1271.8,1184 -202,1184 cw(c-199.89,984.01) 0.11,984.01 ; -1471.47,202.11 ccw(c-1271.48,200) -1271.48,0 -199.99,0 ccw(c-199.99,200) 0,202.11 ; 0.32,198.99 0.32,984.01

## Other copper
Top Layer:
  pour cut-out: 3.03,5.15 3.03,193.04 -651.97,193.04 -651.97,5.15
  text "1" at -139.9,1021 h40
Bottom Layer:
  pour cut-out: -454.89,710.8 -226.3,710.8 -226.3,482.2 -229.1,485 -451.47,485 -451.47,707.38
  pour cut-out: 4.03,5.1 4.03,192.99 -650.97,192.99 -650.97,5.1
  text "4" at -118.9,1021 h40
Layer 1 - GND (plane layer: these items are gaps in the copper):
  pour cut-out: 5.01,-5.02 5.01,192.75 -652.27,192.75 -652.27,-5.02
  text "2" at -149.85,1021.92 h40
Layer 2 - PWR (plane layer: these items are gaps in the copper):
  pour cut-out: 5.33,1.25 5.33,192.75 -651.27,192.75 -651.27,1.25
  text "3" at -149.85,1021.92 h40

## Silkscreen, mask and mechanical layers (free items; w line width, h text height)
Bottom Overlay:
  region: -1256.27,502.75 -1256.27,475.75 -1152.27,475.75 -1152.27,502.75
  region: -1256.27,695.75 -1256.27,672.75 -1152.27,672.75 -1152.27,695.75
  region: -1152.27,695.44 -1175.73,695.44 -1175.73,476.44 -1152.27,476.44
  region: -1232.27,695.75 -1256.27,695.75 -1256.27,476.75 -1232.27,476.75
  rectangle: -232.89,873.29 -206.73,971.29
  rectangle: -40.97,878.29 -13.97,976.75
  region: -444.27,897.29 -444.27,873.29 -13.97,873.29 -13.97,897.29
  text "BTN2" at -1167.27,1158.75 h35 r90
  text "BTN1" at -567.27,1155.75 h35 r90
  text "PWR" at -1297.17,1073.75 h35 r45
  text "ESP32-S3 CO2" at -40.27,896.75 h80
  text "Rev3" at -45.27,824.75 h35
  text "+3.3V" at -1213.9,721 h35
  text "SCD40" at -1175.27,673.75 h80 r90
  text "GND" at -1278.9,626 h35
  text "SCL" at -1278.9,521 h35
  text "SDA" at -1278.9,426 h35
  text "IO0" at -1365.27,212.75 h35
  text "QwiiC" at -744.27,185.75 h35 r90
  text "R" at -1380.27,72.75 h35
Mechanical 1:
  lines w10: -1471.79,198.87 -1471.79,983.89 ; -1471.79,981.89 cw(c-1271.8,984) -1271.8,1184 -202,1184 cw(c-199.89,984.01) 0.11,984.01 ; -1471.47,202.11 ccw(c-1271.48,200) -1271.48,0 -199.99,0 ccw(c-199.99,200) 0,202.11 ; 0.32,198.99 0.32,984.01
Mechanical 15:
  lines w10: -1338.97,-3.96 -1338.97,1186.04 -128.97,1186.04 -128.97,-3.96 -1338.97,-3.96

## Text inside footprints (layer, text, board x,y; h text height)
X1: Top Overlay "1" at -1150.99,406.5 h35 r180; Top Overlay "12" at -1135.99,806.5 h35 r180